# EAGLE board followLineSensor (EAGLE 7.7.0)
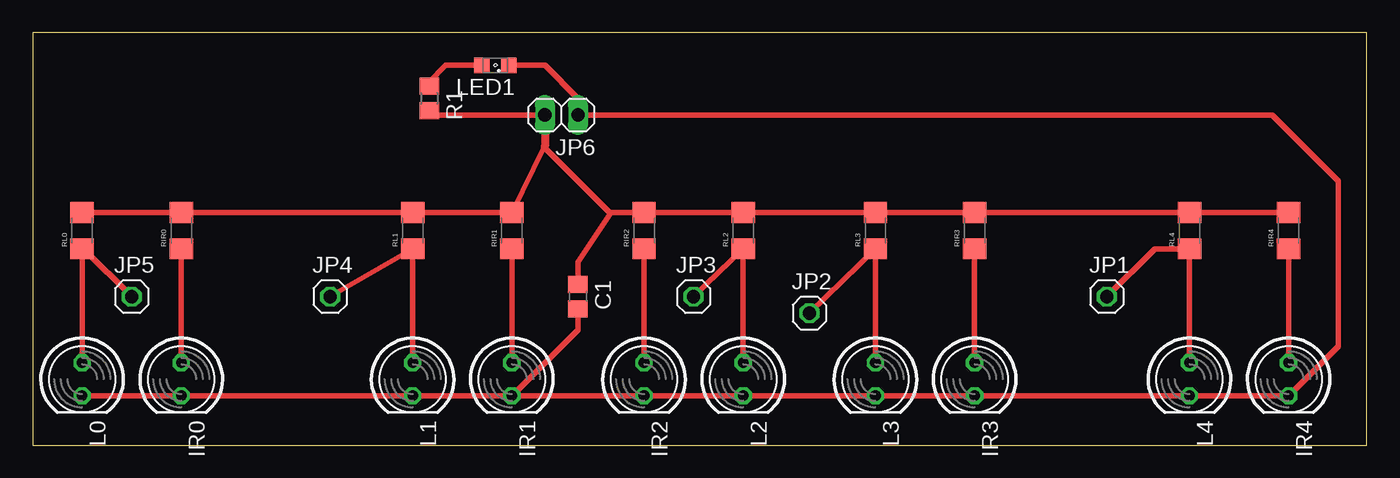
[diagram p0: board, top side]

Size 102.54 x 31.74 mm. Coordinates in mm from the lower left corner, seen from the top.
Outline: 0,0 102.54,0 102.54,31.74 0,31.74 0,0
Copper layers (1*16): Top 0.035mm / dielectric 1.5mm / Bottom 0.035mm
Design rules "default *": minimum track width 0.4mm, minimum drill 24mil, track to track 8mil, track to pad 8mil, pad to pad 8mil, via to via 8mil, smd to smd 8mil, copper to edge 40mil, drill to drill 8mil, minimum pad ring 10mil, minimum via ring 8mil, stop-mask expansion 4mil, vias tented up to drill 0mil, thermal gap 10mil

## Footprints (pad centres in the part's own frame; a part is rotated, then mirrored left to right if it is on the bottom)
C0805 = smd 1.3 x 1.5: 1 -0.95,0; 2 0.95,0
LED5MM = drill 0.813 octagon: A -1.27,0; K 1.27,0
1X01 = drill 1.016 octagon: 1 0,0
1X02 = drill 1.016 long: 1 -1.27,0; 2 1.27,0
SML0805 = smd 1.2 x 1.2: A 1.05,0; C -1.05,0
R0805 = smd 1.3 x 1.5: 1 -0.95,0; 2 0.95,0
1206 = smd 1.6 x 1.8: 1 -1.4,0; 2 1.4,0

## Placement (x,y rotation side)
C1  100nF  [C0805]  41.91,11.43 270 top
IR0  [LED5MM]  11.43,5.08 270 top
IR1  [LED5MM]  36.83,5.08 270 top
IR2  [LED5MM]  46.99,5.08 270 top
IR3  [LED5MM]  72.39,5.08 270 top
IR4  [LED5MM]  96.52,5.08 270 top
JP1  [1X01]  82.55,11.43 0 top
JP2  [1X01]  59.69,10.16 0 top
JP3  [1X01]  50.8,11.43 0 top
JP4  [1X01]  22.86,11.43 0 top
JP5  [1X01]  7.62,11.43 0 top
JP6  [1X02]  40.64,25.4 180 top
L0  [LED5MM]  3.81,5.08 270 top
L1  [LED5MM]  29.21,5.08 270 top
L2  [LED5MM]  54.61,5.08 270 top
L3  [LED5MM]  64.77,5.08 270 top
L4  [LED5MM]  88.9,5.08 270 top
LED1  green  [SML0805]  35.56,29.21 180 top
R1  820  [R0805]  30.48,26.67 270 top
RIR0  270  [1206]  11.43,16.51 90 top
RIR1  270  [1206]  36.83,16.51 90 top
RIR2  270  [1206]  46.99,16.51 90 top
RIR3  270  [1206]  72.39,16.51 90 top
RIR4  270  [1206]  96.52,16.51 90 top
RL0  18K  [1206]  3.81,16.51 90 top
RL1  18K  [1206]  29.21,16.51 90 top
RL2  18K  [1206]  54.61,16.51 90 top
RL3  18K  [1206]  64.77,16.51 90 top
RL4  18K  [1206]  88.9,16.51 90 top

## Library data of the parts
C1 R1 = rcl
IR0 IR1-IR4 L0 L1-L4 LED1 = led
JP1-JP6 = pinhead
RIR0 RIR1-RIR4 RL0 RL1-RL4 = SparkFun-Passives

## Nets
A0: JP5.1 L0.A RL0.1
A1: JP4.1 L1.A RL1.1
A2: JP3.1 L2.A RL2.1
A3: JP2.1 L3.A RL3.1
A4: JP1.1 L4.A RL4.1
GND: C1.2 IR0.K IR1.K IR2.K IR3.K IR4.K JP6.1 L0.K L1.K L2.K L3.K L4.K LED1.C
N$2: LED1.A R1.1
N$17: IR4.A RIR4.1
N$18: IR3.A RIR3.1
N$19: IR2.A RIR2.1
N$20: IR1.A RIR1.1
N$21: IR0.A RIR0.1
VBAT: C1.1 JP6.2 R1.2 RIR0.2 RIR1.2 RIR2.2 RIR3.2 RIR4.2 RL0.2 RL1.2 RL2.2 RL3.2 RL4.2

## Tracks (layer width: path | path; a pad name or v marks a point on that pad's centre or on a via)
A0
  Top 0.406: L0.A RL0.1 3.94,15.11 JP5.1
A1
  Top 0.406: L1.A RL1.1 JP4.1
A2
  Top 0.406: L2.A RL2.1 JP3.1
A3
  Top 0.406: JP2.1 RL3.1 L3.A
A4
  Top 0.406: L4.A RL4.1 86.23,15.11 JP1.1
GND
  Top 0.406: LED1.C 39.37,29.21 41.91,26.67 JP6.1 95.25,25.4 100.33,20.32 100.33,7.62 IR4.K L4.K IR3.K L3.K L2.K IR2.K IR1.K | L0.K IR0.K L1.K IR1.K | C1.2 41.91,8.89 IR1.K
N$2
  Top 0.406: R1.1 30.48,27.94 31.75,29.21 LED1.A
N$17
  Top 0.406: IR4.A RIR4.1
N$18
  Top 0.406: IR3.A RIR3.1
N$19
  Top 0.406: RIR2.1 IR2.A
N$20
  Top 0.406: RIR1.1 IR1.A
N$21
  Top 0.406: RIR0.1 IR0.A
VBAT
  Top 0.406: JP6.2 30.8,25.4 R1.2 | 39.37,22.99 39.3,22.93 | 39.3,22.93 RIR1.2 RL1.2 RIR0.2 RL0.2 | RIR4.2 RL4.2 RIR3.2 RL3.2 RL2.2 47.12,17.91 46.99,17.78 RIR2.2 44.45,17.91 | 44.45,17.91 44.32,17.91 39.3,22.93 | C1.1 41.91,14.1 44.45,17.91
  Top 0.61: JP6.2 39.37,22.99